# Altium PCB MAGIsDebugger-old.PcbDoc
Units mil, origin at the board's own origin, x right, y up, seen from the top; angles counter-clockwise.
Board outline 6000 x 4000 mil, 2 copper layers (Top Layer, Bottom Layer); 29 components, 28 nets, 163 pads, 19 vias.
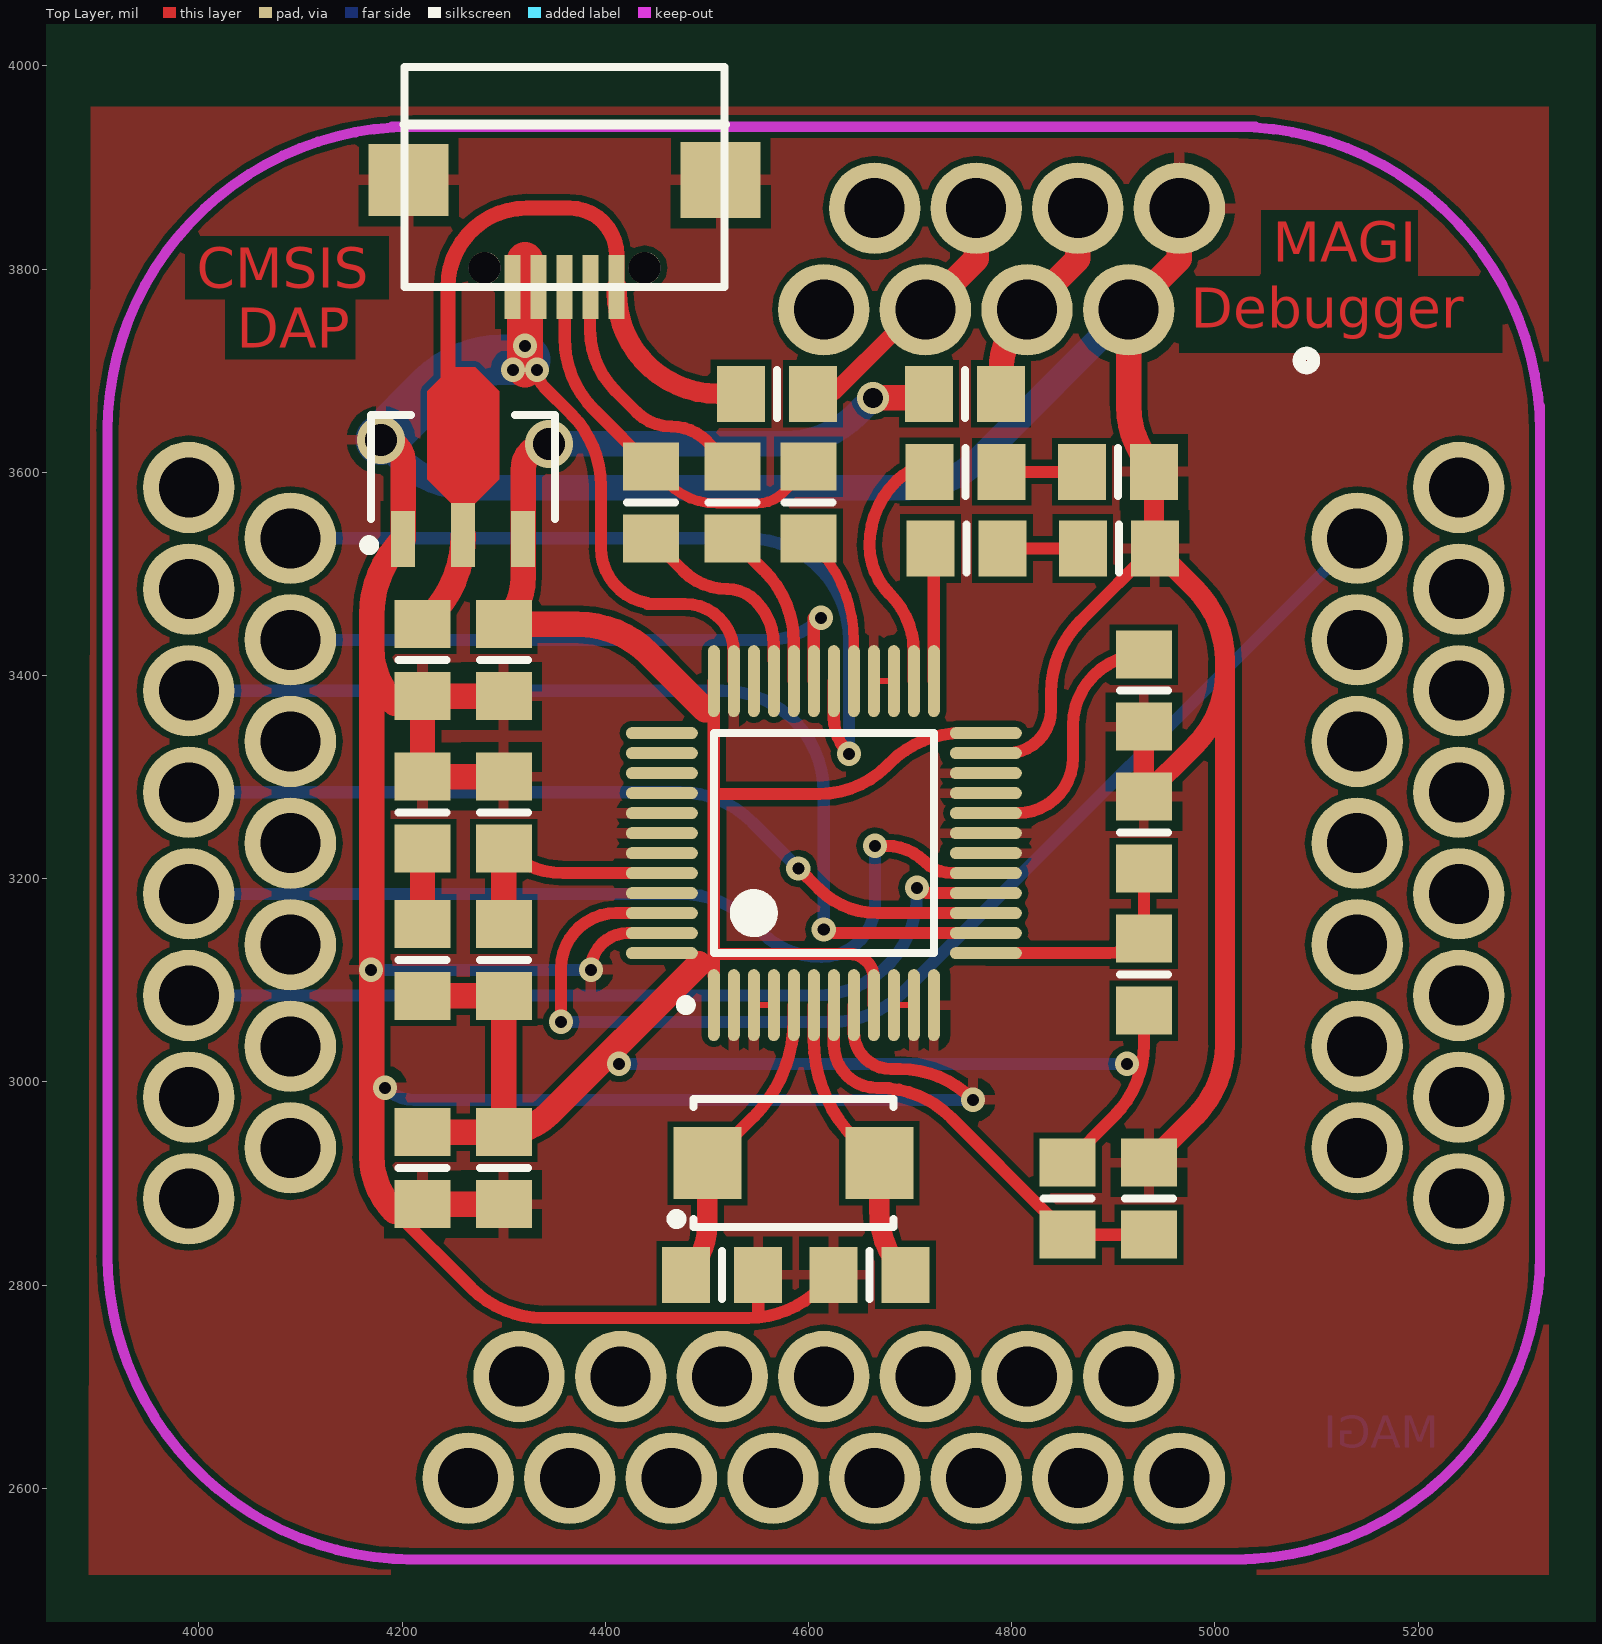
[diagram p0: Top Layer view]
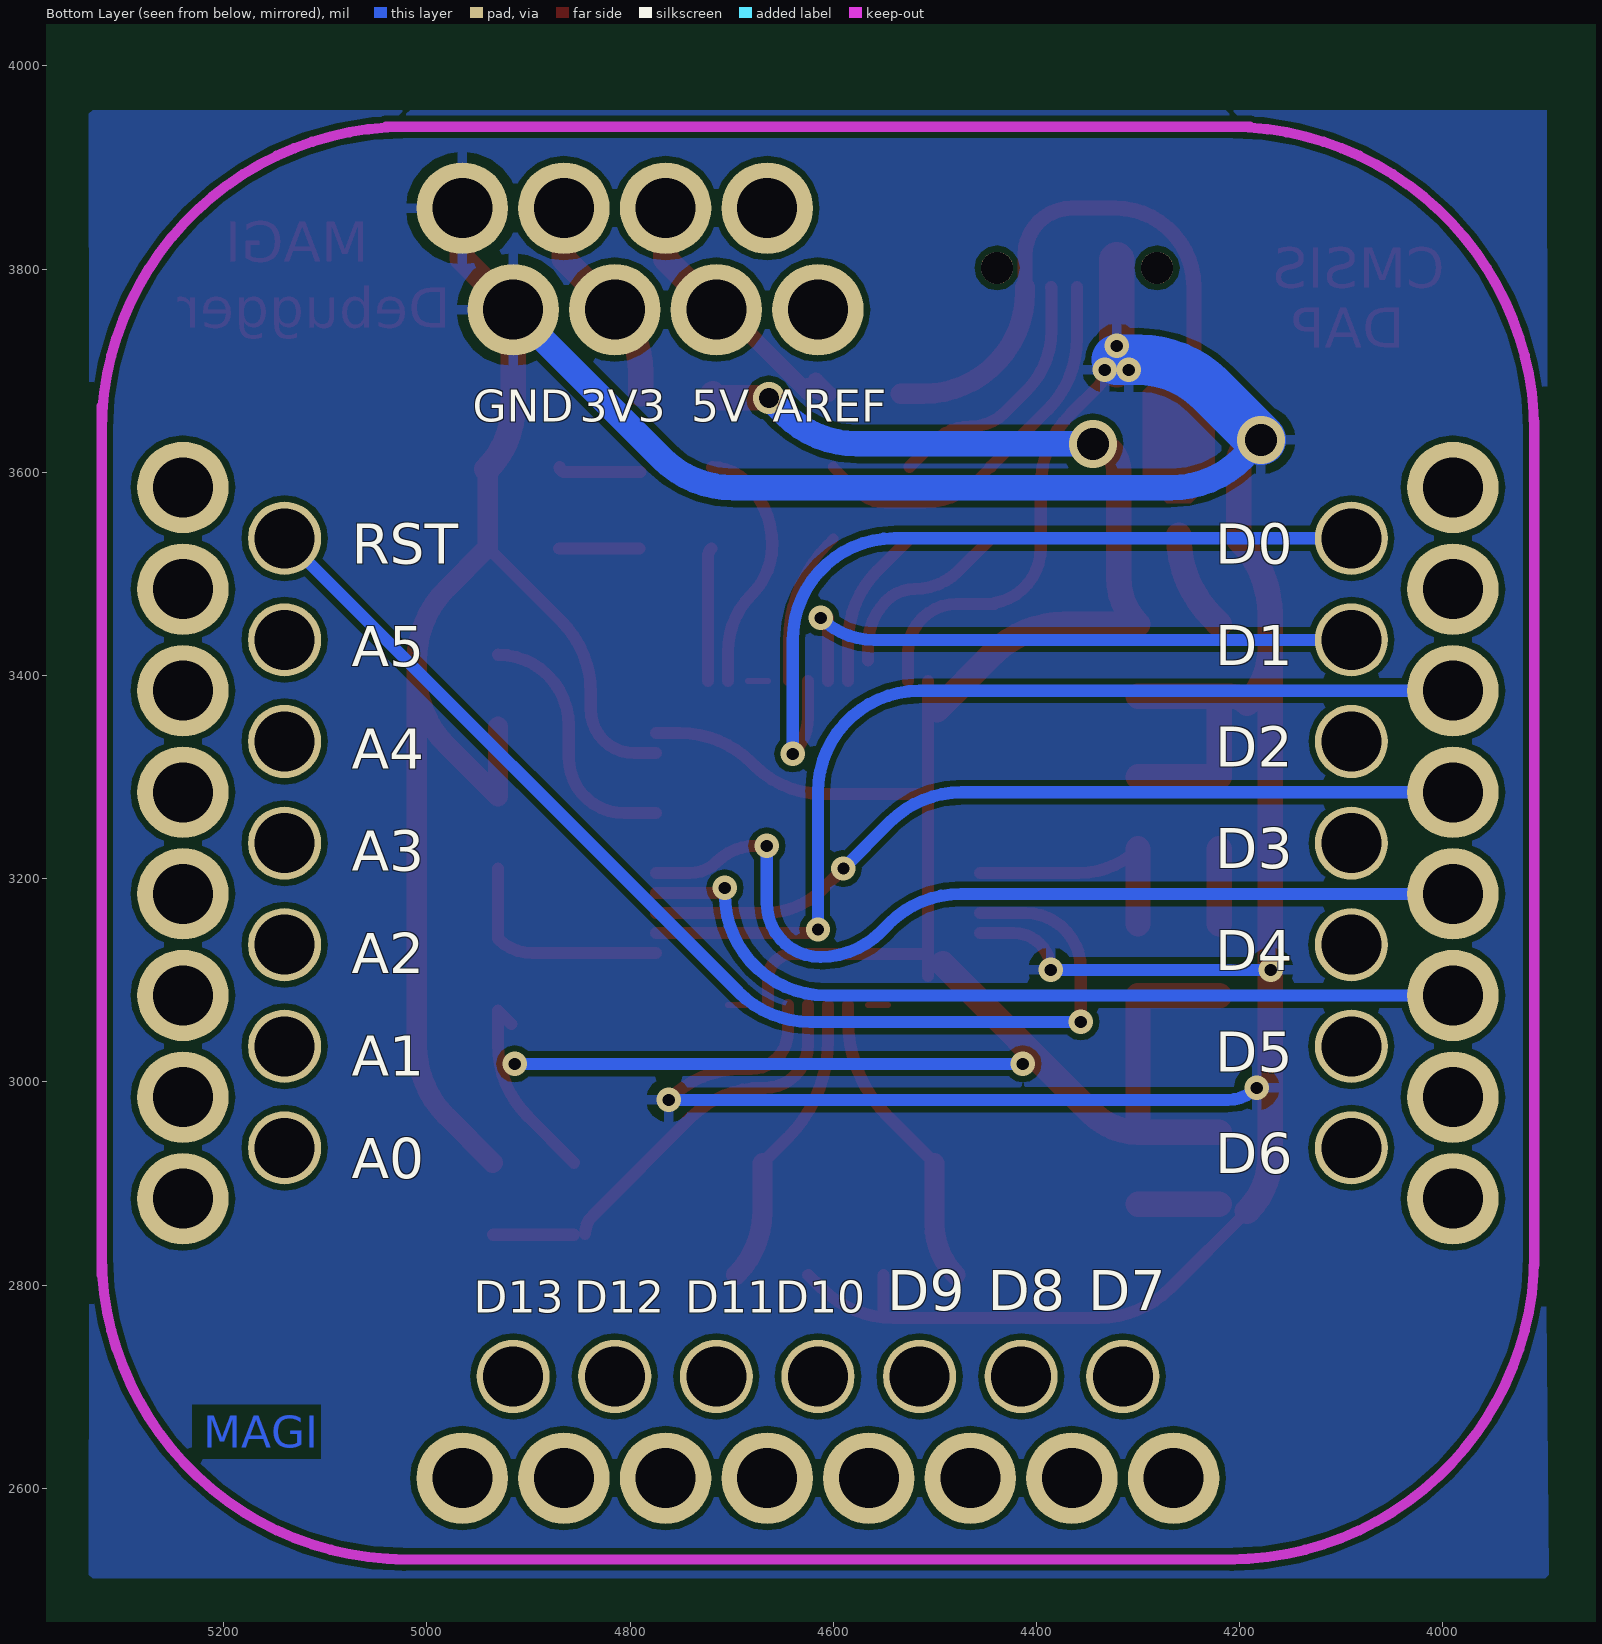
[diagram p1: Bottom Layer view, seen from below]

## Layer stack, top to bottom
Top Solder: solder mask 0.4, Solder Resist, Dk 3.5
Top Layer: signal copper 1.4
Dielectric 1: dielectric 12.6, FR-4, Dk 4.8
Bottom Layer: signal copper 1.4
Bottom Solder: solder mask 0.4, Solder Resist, Dk 3.5

## Board outline
1000,1000 7000,1000 7000,5000 1000,5000

## Design rules (kind name [scope] priority, off if disabled: settings)
Clearance [All] p1: gap=6
PolygonConnect [All] p1: connectstyle=Relief reliefconductorwidth=10 reliefentries=4 polygonreliefangle="90 Angle" airgapwidth=10
RoutingVias [All] p1: holewidth=28 width=50 viastyle="Through Hole" minholewidth=12 minwidth=24 maxholewidth=280 maxwidth=500
SolderMaskExpansion [All] p1: expansion=4
Width [All] p1: maxlimit=100 minlimit=6 preferedwidth=10
29 further rules are at their usual default settings.

## Classes and differential pairs
component class MAGIsDebugger: C1 C2 C3 C4 C5 C6 C7 LED1 LED2 LED3 R1 R2 R3 R4 R5 R6 R7 R8 R9 R10 R11 R12 U1 U2 U3 X1

## Components (designator, comment, footprint, x,y, rotation, side; value= is the part's Value field where it differs from the comment)
C1 "10uf" 6-0805_n 4220,3415 r270 top
C2 "10uf" 6-0805_n 4300,3415 r270 top
C3 "10uf" 6-0805_n 4300,2915 r270 top
C4 "10uf" 6-0805_N 4220,2915 r270 top
C5 "15PF" 6-0805_n 4515,2810 r180 top
C6 "15PF" 6-0805_n 4660,2810 r0 top
C7 "104" 6-0805_n 4935,2885 r270 top
J1 "MAGIsBoard-2x" MAGIsBoard-2x 4615,3235 r0 top
LED1 "LED_3" 6-0805_n 4905.43,3525 r0 top
LED2 "LED_3" 6-0805_n 4904.57,3600.39 r0 top
LED3 "LED_3" 6-0805_n 4220,3265 r90 top
R1 "10K" 6-0805_n 4600,3570 r270 top
R2 "10K" 6-0805_n 4525,3570 r270 top
R3 "10K" 6-0805_n 4930,3105.43 r270 top
R4 "10K" 6-0805_n 4445,3570 r270 top
R5 "10K" 6-0805_n 4930,3245.43 r270 top
R6 "10K" 6-0805_n 4855,2885 r90 top
R7 "10K" 6-0805_n 4300,3120 r270 top
R8 "10K" 6-0805_n 4300,3265 r270 top
R9 "10K" 6-0805_n 4930,3385 r90 top
R10 "RES1_1" 6-0805_n 4755.43,3525 r180 top
R11 "RES1_1" 6-0805_n 4754.57,3600.39 r180 top
R12 "RES1_1" 6-0805_n 4220,3120 r270 top
R13 "0" 6-0805_n 4753.94,3677.17 r0 top
R14 "0" 6-0805_n 4568.9,3677.17 r0 top
U1 "USB" microUSB 4360,3805 r0 top
U2 "STM32F103CBT6" LQFP48_N 4615,3235 r90 top
U3 "HS7333" HS7333 4260,3605 r90 top
X1 "8M" 5032 4595,2920 r270 top

## Footprints (in the part's own frame and the unit in brackets; to place one, negate y for a bottom-side part, rotate by r counter-clockwise, add the part's x,y. Pads: shape width x height; smd on the part's side, far side on the other; paste and mask are expansions set on the pad)
6-0805_n [mm] "Chip Resistor, Body 2.0x1.2mm, IPC Medium Density"
  rect 1.2x1.4 smd: 1(-0.9,0) 2(0.9,0)
  silkscreen extent 0,-0.6 0,0.6, body extent -1.07,-0.7 1.07,0.7, height 0.7
6-0805_N [mm] "Chip Resistor, Body 2.0x1.2mm, IPC Medium Density"
  rect 1.2x1.4 smd: 1(-0.9,0) 2(0.9,0)
  silkscreen extent 0,-0.6 0,0.6, body extent -1.07,-0.7 1.07,0.7, height 0.7
5032 [mm]
  rect 1.8x1.7 smd: 1(0,-2.404) 2(0,1.896)
  silkscreen extent -1.6,-3.3 1.6,2.25
HS7333 [mm] "SOT89, 3-Leads, Body 4.50x2.50mm, Pitch 1.50mm, Lead Span 4.1mm, IPC Medium Density"
  rect 1.4x0.6 smd: 1(-1.8,1.5) 3(-1.8,-1.5)
  rect 1.6x0.6 smd: 2(-1.7,0)
  Top Layer region: -0.9,0.3 -0.3,0.9 1.9,0.9 2.5,0.3 2.5,-0.3 1.9,-0.9 -0.3,-0.9 -0.9,-0.3
  silkscreen extent -2.07,-2.3 1.3,2.47, body extent -1.3,-2.3 1.3,2.3, height 1.6
LQFP48_N [mm] "Thin QFP, 48-Leads, Body 7x7mm, Pitch 0.5mm, IPC Medium Density"
  oval 1.8x0.3 smd: 1(-4.05,2.75) 2(-4.05,2.25) 3(-4.05,1.75) 4(-4.05,1.25) 5(-4.05,0.75) 6(-4.05,0.25) 7(-4.05,-0.25) 8(-4.05,-0.75) 9(-4.05,-1.25) 10(-4.05,-1.75) 11(-4.05,-2.25) 12(-4.05,-2.75) 25(4.05,-2.75) 26(4.05,-2.25) 27(4.05,-1.75) 28(4.05,-1.25) 29(4.05,-0.75) 30(4.05,-0.25) 31(4.05,0.25) 32(4.05,0.75) 33(4.05,1.25) 34(4.05,1.75) 35(4.05,2.25) 36(4.05,2.75)
  oval 0.3x1.8 smd: 13(-2.75,-4.05) 14(-2.25,-4.05) 15(-1.75,-4.05) 16(-1.25,-4.05) 17(-0.75,-4.05) 18(-0.25,-4.05) 19(0.25,-4.05) 20(0.75,-4.05) 21(1.25,-4.05) 22(1.75,-4.05) 23(2.25,-4.05) 24(2.75,-4.05) 37(2.75,4.05) 38(2.25,4.05) 39(1.75,4.05) 40(1.25,4.05) 41(0.75,4.05) 42(0.25,4.05) 43(-0.25,4.05) 44(-0.75,4.05) 45(-1.25,4.05) 46(-1.75,4.05) 47(-2.25,4.05) 48(-2.75,4.05)
  silkscreen extent -4.17,-2.75 2.75,3.57, body extent -3.5,-3.5 3.5,3.5, height 1.6
MAGIsBoard-2x [mil]
  round 90 hole 59.06: 1(300,525) 1(350,625) 2(200,525) 2(250,625) 3(100,525) 3(150,625) 4(0,525) 4(50,625) 29(-625,350) 30(-625,250) 31(-625,150) 32(-625,50) 33(-625,-50) 34(-625,-150) 35(-625,-250) 36(-625,-350) 37(-350,-625) 38(-250,-625) 39(-150,-625) 40(-50,-625) 41(50,-625) 42(150,-625) 43(250,-625) 44(350,-625) 45(625,-350) 46(625,-250) 47(625,-150) 48(625,-50) 49(625,50) 50(625,150) 51(625,250) 52(625,350)
  round 90 / inner round 90 / far side round 72 hole 59.06: 8(-525,300) 9(-525,200) 10(-525,100) 11(-525,0) 12(-525,-100) 13(-525,-200) 14(-525,-300) 15(-300,-525) 16(-200,-525) 17(-100,-525) 18(0,-525) 19(100,-525) 20(200,-525) 21(300,-525) 22(525,-300) 23(525,-200) 24(525,-100) 25(525,0) 26(525,100) 27(525,200) 28(525,300)
  Keep-Out Layer lines w10: -705,-415 -705,415 ; -705,-405 ccw(c-405,-405) -405,-705 ; -705,405 cw(c-405,405) -405,705 ; -425,705 425,705 ; -410,-705 415,-705 ; 405,-705 ccw(c405,-405) 705,-405 ; 405,705 cw(c405,405) 705,405 ; 705,-425 705,430
  silkscreen extent 468,468 482,482
microUSB [mm]
  round 0.8 hole 0.8: 0(-2,-0.1) 0(2,-0.1)
  rect 0.4x1.6 smd: 1(1.3,-0.576) 2(0.65,-0.576) 3(0,-0.576) 4(-0.65,-0.576) 5(-1.3,-0.576)
  rect 2x1.8 smd: 6(-3.9,2.1)
  rect 2x1.9 smd: 7(3.9,2.1)
  silkscreen extent -4,-0.58 4,4.92, body extent -4.1,-0.68 4.1,5.02, height 3

## Part data
C1 C2 C3 C4: library part "CAPACITOR POL", "Capacitor"
C5 C6 C7: library part CAP
R1 R2 R3 R4 R5 R6 R7 R8 R9 R13 R14: library part RES
U2: "STM32 ARM-based 32-bit MCU with 128 Kbytes Flash, 48-pin LQFP, Industrial Temperature"
X1: library part CRYSTAL

## Via types
v1: diameter 24, hole 12, Top Layer to Bottom Layer, 16 vias
v2: diameter 47.24, hole 31.5, Top Layer to Bottom Layer, 2 vias
v3: diameter 31.5, hole 19.68, Top Layer to Bottom Layer, 1 vias

## Nets (pads, with @x,y where several pads share a name; then routed paths per layer and width w, separated by ;. In a path a pad name is that pad's centre, name@x,y a point inside that pad or via, vN(x,y) a via of type N, cw(c..) or ccw(c..) an arc to the next point about the centre after c; other vN are vias at no path point)
3.3V: C2.1 C3.1 C4.1 R3.2 R6.2 R7.2 R12.2 R13.1 U2.1 U2.9 U2.24 U2.36 U2.48 U3.3 | length 2834.5
  Top Layer w12: U2.1@4506.73,3104.33 4506.73,3126.73 ; U2.36 4506.73,3283.46 ; U2.9 4664.21,3101.54 ccw(c4639.76,3101.54) 4639.76,3125.98 4507.48,3125.98 cw(c4507.48,3126.73) 4506.73,3126.73 ; U2.24 4750.83,3343.27 ccw(c4750.83,3243.27) 4680.12,3313.98 4677.17,3311.02 cw(c4610.63,3377.56) 4610.63,3283.46 4506.73,3283.46 ; R6.2 4900.71,2966.14 ccw(c4830,3036.85) 4930,3036.85 R3.2 R3.2@4916.85,3056.85 ; 4506.73,3126.73 4506.73,3283.46
  Top Layer w25: C4.1 C3.1 ; R12.2 R7.2 C3.1 ; v2(4344.49,3627.95) ccw(c4344.49,3602.52) 4319.06,3602.52 U3.3 4319.06,3496.44 cw(c4254,3496.44) C2.1 4372.32,3450.43 cw(c4372.32,3350.43) 4443.03,3421.14 4498.03,3366.14 ; 4492.13,3116.14 4345.1,2969.11 cw(c4300,3014.21) C3.1 ; v3(4663.39,3673.23) 4709,3673.23 ccw(c4709,3686.67) R13.1
  Bottom Layer w12: v1(4413.39,3017.72) v1(4913.39,3017.72)
  Bottom Layer w25: v2(4344.49,3627.95) 4576.69,3627.95 ccw(c4576.69,3727.95) 4647.4,3657.24 v3(4663.39,3673.23)
5V: C1.1 R14.1 U1.1 U3.2 | length 712.3
  Top Layer w15: 4250,3625 cw(c4250,3630) 4245,3630 4245,3782.34 cw(c4322.66,3782.34) 4322.66,3860 4365,3860 cw(c4365,3813.82) 4411.18,3813.82 U1.1
  Top Layer w20: U1.1 4411.18,3777.17 ccw(c4511.18,3777.17) 4511.18,3677.17 R14.1
  Top Layer w25: C1.1 4226.31,3456.75 ccw(c4144.99,3538.07) U3.2
BOOT0: R7.1 R8.2 U2.44 | length 236.1
  Top Layer w12: R8.2 ccw(c4358.17,3287.74) 4358.17,3205.47 U2.44
  Top Layer w25: R7.1 R8.2
BOOT1: R9.2 U2.20 | length 258.2
  Top Layer w12: U2.20 4805.87,3264.53 ccw(c4805.87,3318.9) 4860.24,3318.9 4860.24,3350.67 cw(c4930,3350.67) R9.2
GND: C1.2 C2.2 C3.2 C4.2 C5.1 C6.1 C7.1 J1.1 LED1.2 LED2.2 LED3.2 R5.1 R8.1 R9.1 U1.4 U1.5 U1.6 U1.7 U2.2 U2.3 U2.4 U2.8 U2.10 U2.11 U2.12 U2.18 U2.19 U2.21 U2.22 U2.23 U2.27 U2.28 U2.35 U2.41 U2.42 U2.43 U2.45 U2.47 U3.1 | length 5878
  Top Layer w6: U2.3 U2.4 ; U2.28 U2.27 ; U2.10 U2.11
  Top Layer w12: 4192.44,2872.68 4268.11,2797.01 ccw(c4338.82,2867.72) 4338.82,2767.72 4540.86,2767.72 ccw(c4540.86,2867.72) 4611.57,2797.01 C6.1 ; v1(4332.68,3700.79) ccw(c4356.44,3700.79) 4339.63,3683.99 4366.38,3657.24 cw(c4295.67,3586.53) 4395.67,3586.53 4395.67,3525.59 ccw(c4450.79,3525.59) 4441.1,3471.33 ccw(c4441.96,3471.33) 4441.96,3470.47 4478.35,3470.47 cw(c4478.35,3422.4) 4526.42,3422.4 U2.35 ; v1(4385.83,3110.24) cw(c4422.01,3110.24) 4422.01,3146.42 U2.47 ; 4549.02,2768.05 ccw(c4545.62,2771.45) 4550.43,2771.45 C5.1 ; U2.8 4644.53,3049.24 ccw(c4681.1,3049.24) 4681.1,3012.67 4690.01,3012.67 cw(c4690.01,2912.67) 4760.72,2983.38 v1(4761.81,2982.28) ; U2.23 4796.02,3323.58 ccw(c4796.02,3366.14) 4838.58,3366.14 4838.58,3383.03 cw(c4938.58,3383.03) 4867.87,3453.74 LED1.2@4940,3525.87
  Top Layer w20: R9.1 R5.1 4980.55,3331.42 ccw(c4909.84,3402.13) 5009.84,3402.13 ; C7.1 4980.55,2965.99 ccw(c4909.84,3036.7) 5009.84,3036.7 5009.84,3402.13 ; LED2.2@4940,3603.79 4940,3525.87 ccw(c4940.87,3525.87) LED1.2 4980.55,3485.31 cw(c4909.84,3414.6) 5009.84,3414.6 5009.84,3402.13
  Top Layer w25: v2(4179.13,3631.89) cw(c4179.13,3610.08) 4200.94,3610.08 U3.1 ccw(c4275.65,3459.43) 4170,3459.43 4170,3426.85 ; 4192.44,2872.68 cw(c4246.62,2926.85) 4170,2926.85 4170,3426.85 ; C4.2 C3.2 ; R8.1 LED3.2 C1.2 ; C2.2 C1.2 ; LED2.2@4940.87,3602.91 cw(c5003.31,3665.36) 4940,3603.79 cw(c5003.31,3665.36) 4915,3665.36 4915,3760 4965,3810 J1.1@4965,3860 ; 4170,3426.85 ccw(c4246.62,3426.85) 4192.44,3372.68 cw(c4209.07,3356.04) 4209.07,3379.57 C1.2
  Top Layer w35: v1@4320.87,3700.79 v1(4320.87,3724.41) 4320.87,3809.06
  Bottom Layer w12: v1(4169.29,3110.24) v1(4385.83,3110.24) ; v1(4183.07,2994.09) ccw(c4211.59,3022.61) 4211.59,2982.28 v1(4761.81,2982.28)
  Bottom Layer w25: v2(4179.13,3631.89) 4197.09,3613.93 ccw(c4267.8,3684.65) 4267.8,3584.65 4698.22,3584.65 ccw(c4698.22,3684.65) 4768.93,3613.94 J1.1@4915,3760
  Bottom Layer w50: v2(4179.13,3631.89) 4228.58,3681.34 cw(c4299.3,3610.63) 4299.3,3710.63 4320.87,3710.63
  other v1: 4309.06,3700.79
GRN: R10.2 U2.25 | length 131.4
  Top Layer w12: R10.2 cw(c4712.11,3517.11) 4723.27,3517.11 U2.25
NetJ1_2: J1.2 R13.2 | length 210.4
  Top Layer w25: R13.2 4789.37,3698.12 cw(c4876.88,3698.12) 4815,3760 4865,3810 J1.2@4865,3860
NetJ1_3: J1.3 R14.2 | length 287.2
  Top Layer w16: R14.2@4617.15,3689.99 R14.2 ccw(c4604.33,3704.38) 4623.57,3685.13 4625.54,3679.23 J1.3@4688.7,3742.38 ; J1.3@4686.73,3748.29 cw(c4715,3720.02) J1.3@4715,3760
  Top Layer w25: J1.3@4715,3760 4765,3810 J1.3@4765,3860
NetLED1_1: LED1.1 R10.1 | length 79.1
  Top Layer w12: R10.1 LED1.1
NetLED2_1: LED2.1 R11.1 | length 81.8
  Top Layer w12: R11.1 4864.53,3600.39 ccw(c4864.53,3605) LED2.1@4869.13,3605
NetLED3_1: LED3.1 R12.1 | length 74.1
  Top Layer w25: R12.1 LED3.1
NetR1_2: R1.2 U2.29 | length 152.7
  Top Layer w10: R1.2 4604.69,3529.87 cw(c4508.53,3433.71) 4644.53,3433.71 U2.29
NetR2_2: R2.2 U2.32 | length 160.9
  Top Layer w12: R2.2 4556.18,3503.38 cw(c4485.47,3432.67) 4585.47,3432.67 U2.32
NetR4_2: R4.2 U2.33 | length 187.2
  Top Layer w12: R4.2 4476.58,3502.98 ccw(c4520,3546.4) 4520,3485 cw(c4520,3445.83) 4547.7,3473.53 cw(c4504.03,3429.86) 4565.79,3429.86 U2.33@4565.79,3414.81
NRST: C7.2 R6.1 U2.7 | length 422.7
  Top Layer w12: U2.7 4624.84,3036.57 ccw(c4667.32,3036.57) 4667.32,2994.09 4669.48,2994.09 cw(c4669.48,2894.09) 4740.19,2964.81 4836.92,2868.08 cw(c4819.4,2850.56) R6.1@4844.18,2850.56 ; R6.1 C7.2
OSC_IN: C5.2 U2.5 X1.1 | length 300.5
  Top Layer w12: X1.1 4545.64,2965.28 ccw(c4449.47,3061.45) 4585.47,3061.45 U2.5
  Top Layer w20: C5.2 ccw(c4429.38,2860.18) 4500.35,2860.18 X1.1
OSC_OUT: C6.2 U2.6 X1.2 | length 293.3
  Top Layer w12: U2.6 4605.16,3040.82 ccw(c4741.16,3040.82) 4644.99,2944.65 X1.2
  Top Layer w20: X1.2 4669.65,2872.26 ccw(c4757.69,2872.26) C6.2
PA3-VREF: R3.1 R5.2 U2.13 | length 228.5
  Top Layer w12: U2.13 4895.88,3126.73 ccw(c4895.88,3174.99) R3.1 R5.2
RED: R11.2 U2.26 | length 252.1
  Top Layer w12: U2.26 4703.58,3423.07 ccw(c4623.07,3423.07) 4680,3480 cw(c4728.28,3528.28) 4660,3528.28 cw(c4748.64,3528.28) 4685.96,3590.96 4686.47,3591.47 cw(c4719.13,3558.81) R11.2@4719.13,3605
RXD: J1.8 U2.30 | length 794.6
  Top Layer w12: U2.30 4624.84,3358.86 ccw(c4675.79,3358.86) v1(4639.76,3322.83)
  Bottom Layer w12: J1.8 4539.76,3535 cw(c4539.76,3435) 4639.76,3435 v1(4639.76,3322.83)
TCK: J1.32 U2.15 | length 825.9
  Top Layer w12: v1(4590,3210) 4610,3190 ccw(c4667.69,3247.69) 4667.69,3166.1 U2.15
  Bottom Layer w12: J1.32 4473.58,3285 cw(c4473.58,3185) 4544.29,3255.71 v1(4590,3210)
TDI: J1.33 U2.17 | length 896
  Top Layer w12: v1(4665.35,3232.28) 4676.55,3232.28 cw(c4676.55,3178.52) 4714.57,3216.54 ccw(c4741.28,3243.24) 4741.28,3205.47 U2.17
  Bottom Layer w12: J1.33 4474.37,3185 cw(c4474.37,3085) 4545.08,3155.71 4553.22,3147.57 ccw(c4612.57,3206.93) 4612.57,3122.98 ccw(c4612.57,3175.76) 4665.35,3175.76 v1(4665.35,3232.28)
TDO: J1.34 U2.16 | length 848.9
  Top Layer w12: v1(4706.69,3190.94) ccw(c4719.14,3203.4) 4719.14,3185.79 U2.16
  Bottom Layer w12: J1.34 4606.69,3085 ccw(c4606.69,3185) 4706.69,3185 v1(4706.69,3190.94)
TMS: J1.31 U2.14 | length 971.6
  Top Layer w12: v1@4625,3146.42 U2.14
  Bottom Layer w12: J1.31 4515,3385 cw(c4515,3285) 4615,3285 v1(4615,3150) v1@4611.42,3146.42
TRST: J1.28 U2.46 | length 1159.5
  Top Layer w12: v1(4356.3,3059.06) 4356.3,3111.62 cw(c4410.78,3111.62) 4410.78,3166.1 U2.46
  Bottom Layer w12: v1(4356.3,3059.06) 4622.63,3059.06 ccw(c4622.63,3159.06) 4693.34,3088.34 J1.28
TXD: J1.9 U2.31 | length 590.2
  Top Layer w12: U2.31 v1@4605.16,3456.69
  Bottom Layer w12: J1.9 4559.83,3435 ccw(c4559.83,3509.06) v1(4612.2,3456.69)
USBDM: R2.1 U1.2 | length 250.9
  Top Layer w12: U1.2 ccw(c4387.02,3780.92) 4385,3780.92 4385,3740 ccw(c4469.5,3740) 4409.75,3680.25 4430.86,3659.14 ccw(c4465,3693.28) 4465,3645 cw(c4465,3595.67) 4499.88,3630.55 R2.1
USBDP: R1.1 R4.1 U1.3 | length 388.5
  Top Layer w10: R4.1 4460.91,3589.52 ccw(c4510,3638.61) 4510,3569.19 4548.9,3569.19 ccw(c4548.9,3606.1) 4575,3580 4600,3605 R1.1
  Top Layer w12: U1.3 4360,3731.85 ccw(c4460,3731.85) 4389.29,3661.14 R4.1
pads on no net: J1.4 J1.10 J1.11 J1.12 J1.13 J1.14 J1.15 J1.16 J1.17 J1.18 J1.19 J1.20 J1.21 J1.22 J1.23 J1.24 J1.25 J1.26 J1.27 J1.29 J1.30 J1.35 J1.36 J1.37 J1.38 J1.39 J1.40 J1.41 J1.42 J1.43 J1.44 J1.45 J1.46 J1.47 J1.48 J1.49 J1.50 J1.51 J1.52 U1.0 U2.34 U2.37 U2.38 U2.39 U2.40

## Polygon pours and split planes (outlines as drawn)
GND on Bottom Layer "Bottom Layer-No Net" (solid, pour order 2): 3897.46,3956.27 5332.5,3956.27 5332.5,2511.39 3895.5,2511.39
GND on Top Layer "Bottom Layer-No Net" (solid, pour order 4): 3893.7,3959.58 5328.74,3959.58 5328.74,2514.7 3891.74,2514.7 3891.74,2521.39

## Other copper
Top Layer:
  text "MAGI" at 5057.09,3807.09 h39.37
  text "CMSIS" at 3998.03,3781.5 h39.37
  text "Debugger" at 4976.38,3742.13 h39.37
  text "DAP" at 4037.4,3722.44 h39.37

## Text inside footprints (layer, text, board x,y; h text height)
J1: Bottom Overlay "D0" at 4223.98,3510.08 h39.37; Bottom Overlay "D1" at 4223.98,3410.08 h39.37; Bottom Overlay "D2" at 4223.98,3310.08 h39.37; Bottom Overlay "D3" at 4223.98,3210.08 h39.37; Bottom Overlay "D4" at 4223.98,3110.08 h39.37; Bottom Overlay "D5" at 4223.98,3010.08 h39.37; Bottom Overlay "D6" at 4223.98,2910.08 h39.37; Bottom Overlay "D7" at 4348.98,2775.08 h39.37; Bottom Overlay "D8" at 4447.98,2775.08 h39.37; Bottom Overlay "D9" at 4546.98,2775.08 h39.37; Bottom Overlay "D10" at 4656.97,2772.95 h31.5; Bottom Overlay "D11" at 4745.48,2772.95 h31.5; Bottom Overlay "D12" at 4854.98,2772.95 h31.5; Bottom Overlay "D13" at 4953.98,2772.95 h31.5; Bottom Overlay "A0" at 5073.98,2905.08 h39.37; Bottom Overlay "A1" at 5073.98,3005.91 h39.37; Bottom Overlay "A2" at 5073.98,3106.75 h39.37; Bottom Overlay "A3" at 5073.98,3207.58 h39.37; Bottom Overlay "A4" at 5073.98,3308.41 h39.37; Bottom Overlay "A5" at 5073.98,3409.25 h39.37; Bottom Overlay "RST" at 5073.98,3510.08 h39.37; Bottom Overlay "GND" at 4954.57,3649.84 h31.5; Bottom Overlay "3V3" at 4849.57,3649.84 h31.5; Bottom Overlay "5V" at 4739.57,3649.84 h31.5; Bottom Overlay "AREF" at 4659.57,3649.84 h31.5; Bottom Layer "MAGI" at 5220,2640 h31.5